# Altium PCB main.PcbDoc (part 1 of 2)
Units mm, origin at the board's own origin, x right, y up, seen from the top; angles counter-clockwise.
Board outline 97 x 82.5 mm, 4 copper layers (Top Layer, Ground Layer, Power Layer, Bottom Layer), stack 1.591 mm thick; 87 components, 68 nets, 365 pads, 232 vias.
Unrouted connection lines stored in the file: 2.
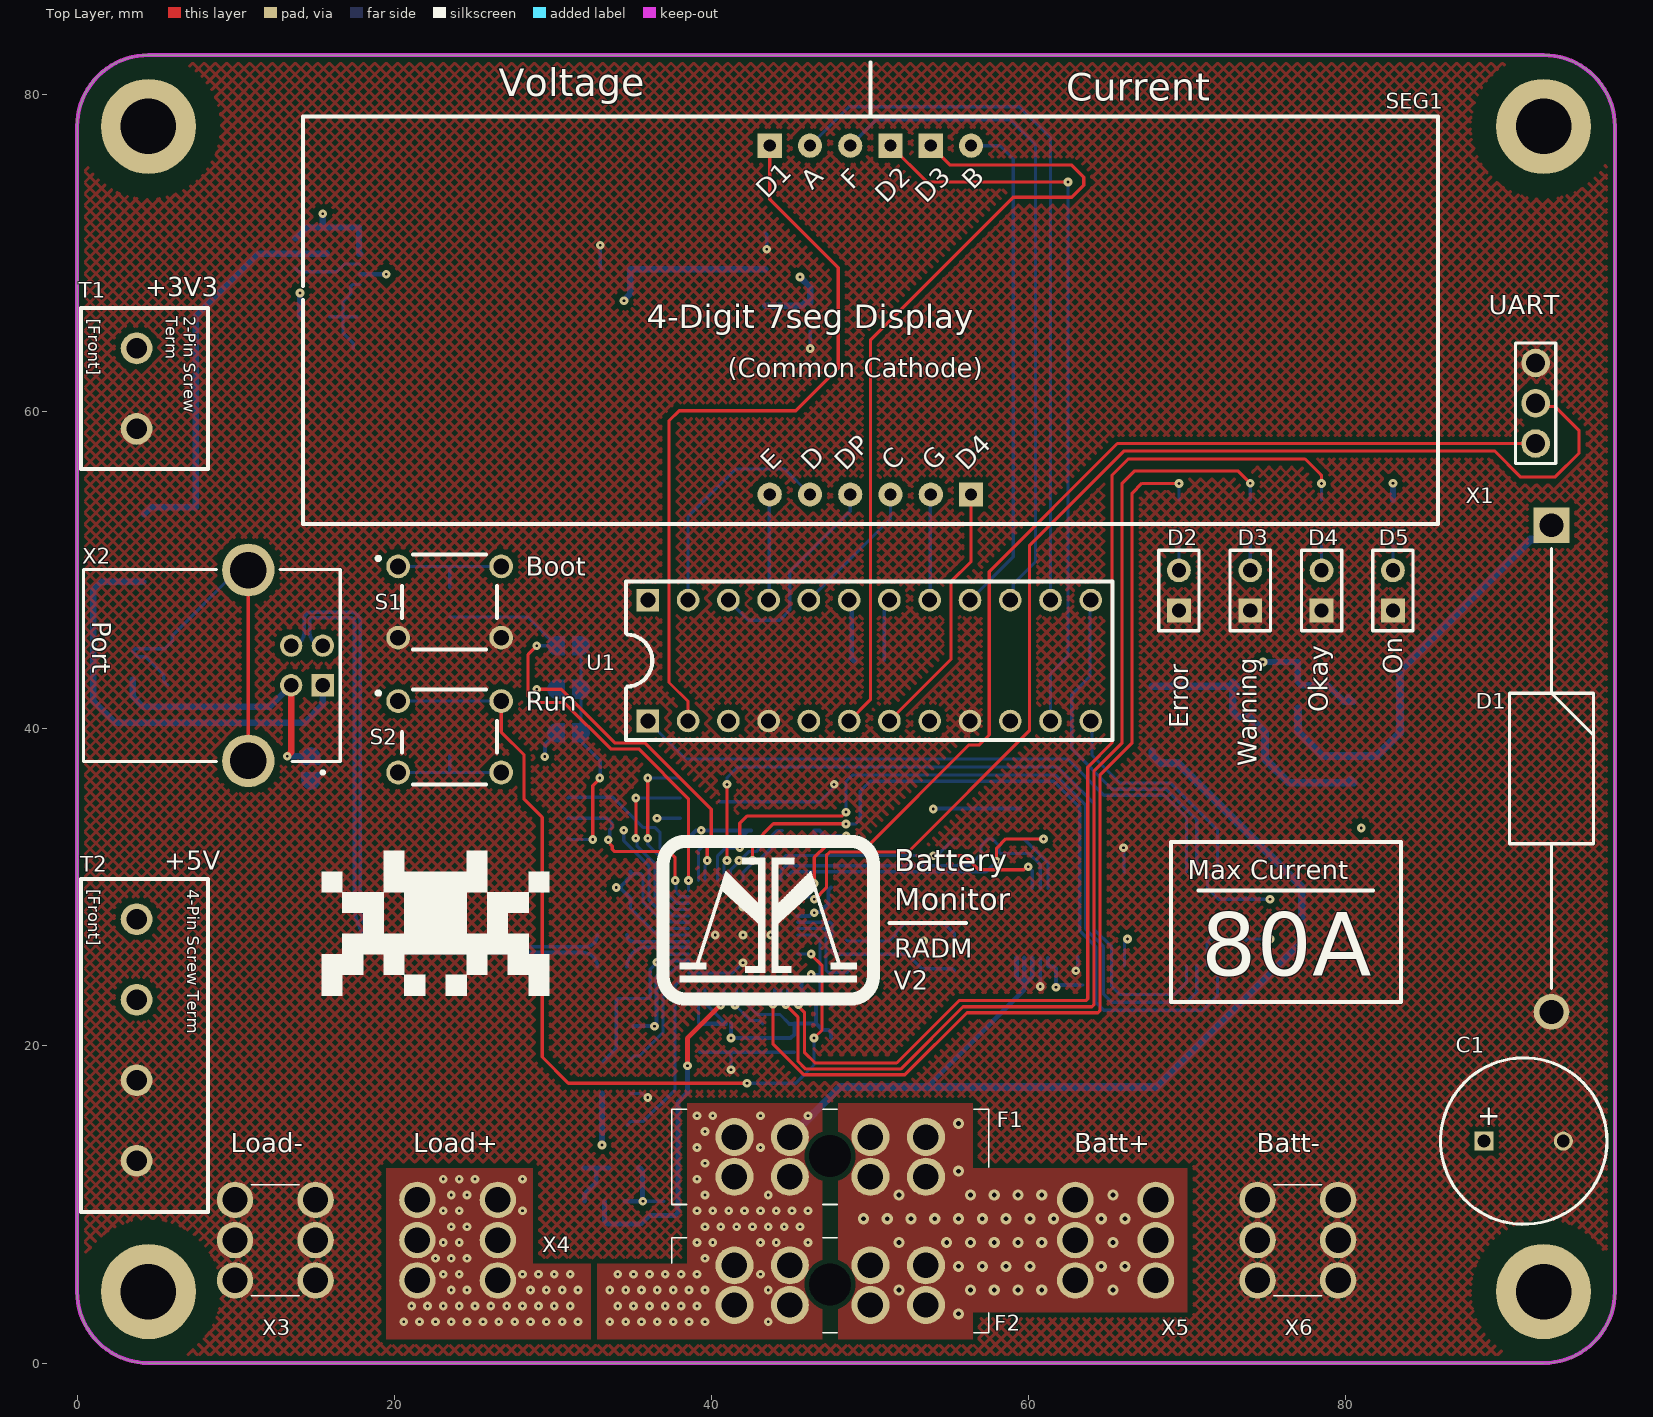
[diagram p0: Top Layer view]
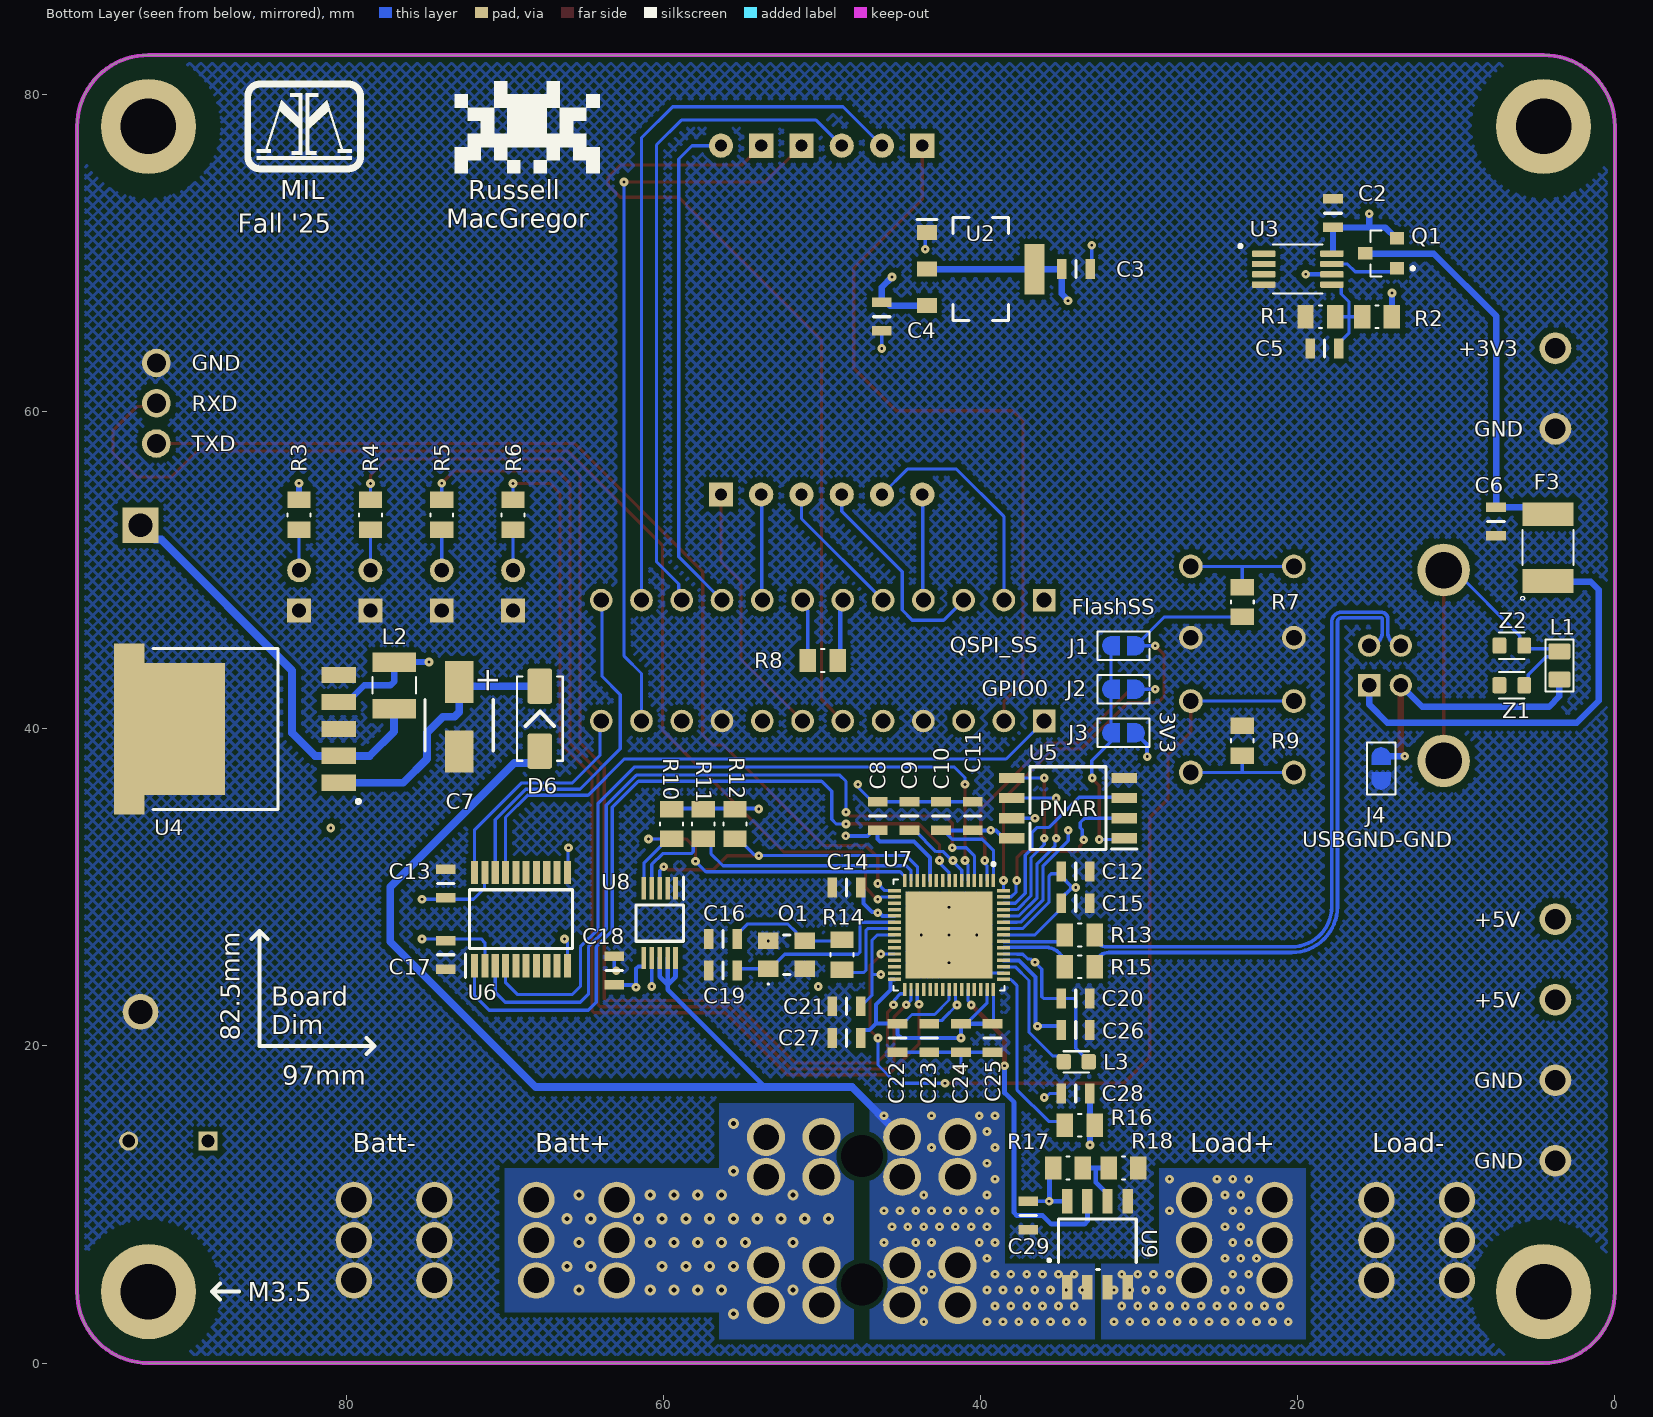
[diagram p1: Bottom Layer view, seen from below]
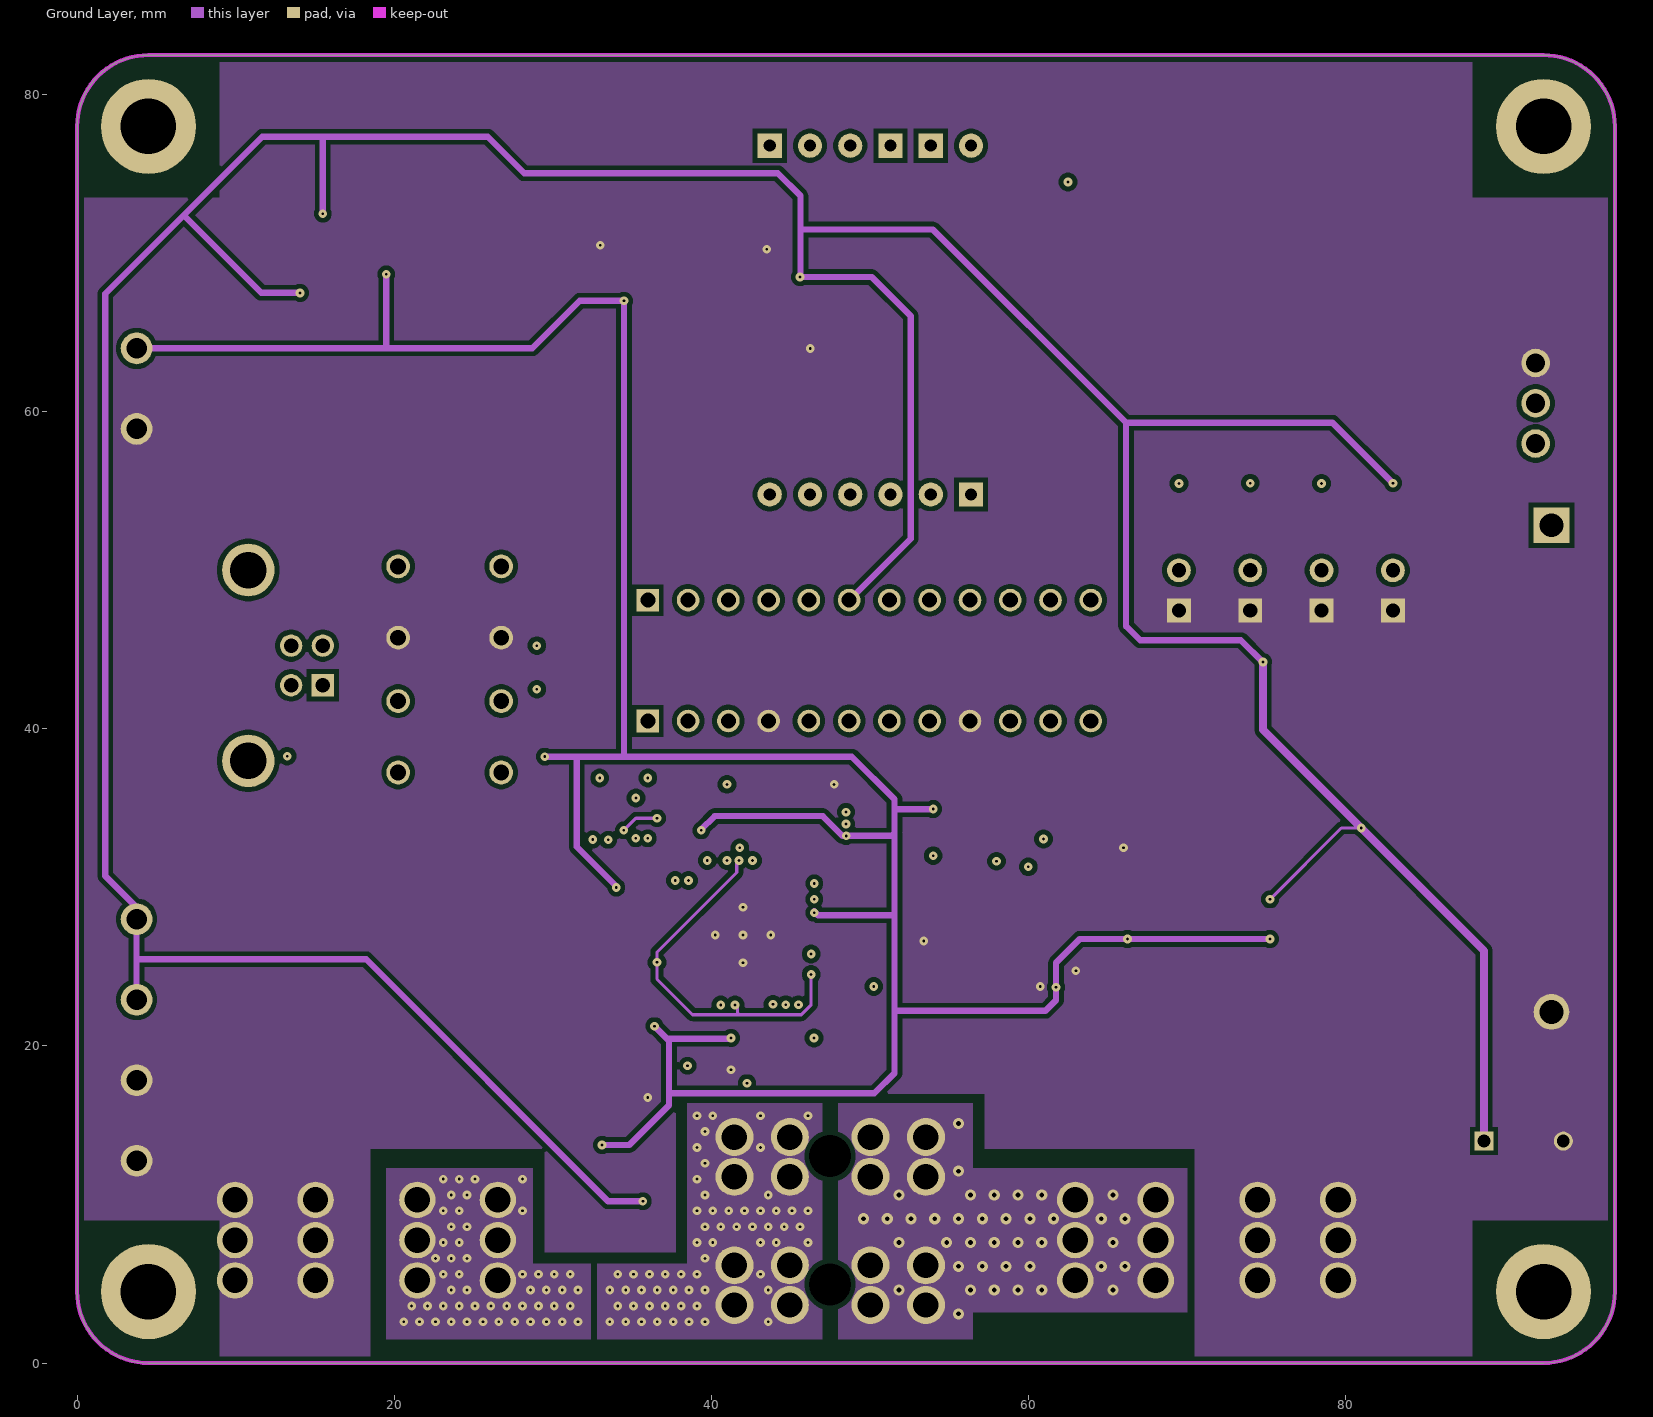
[diagram p2: Ground Layer]
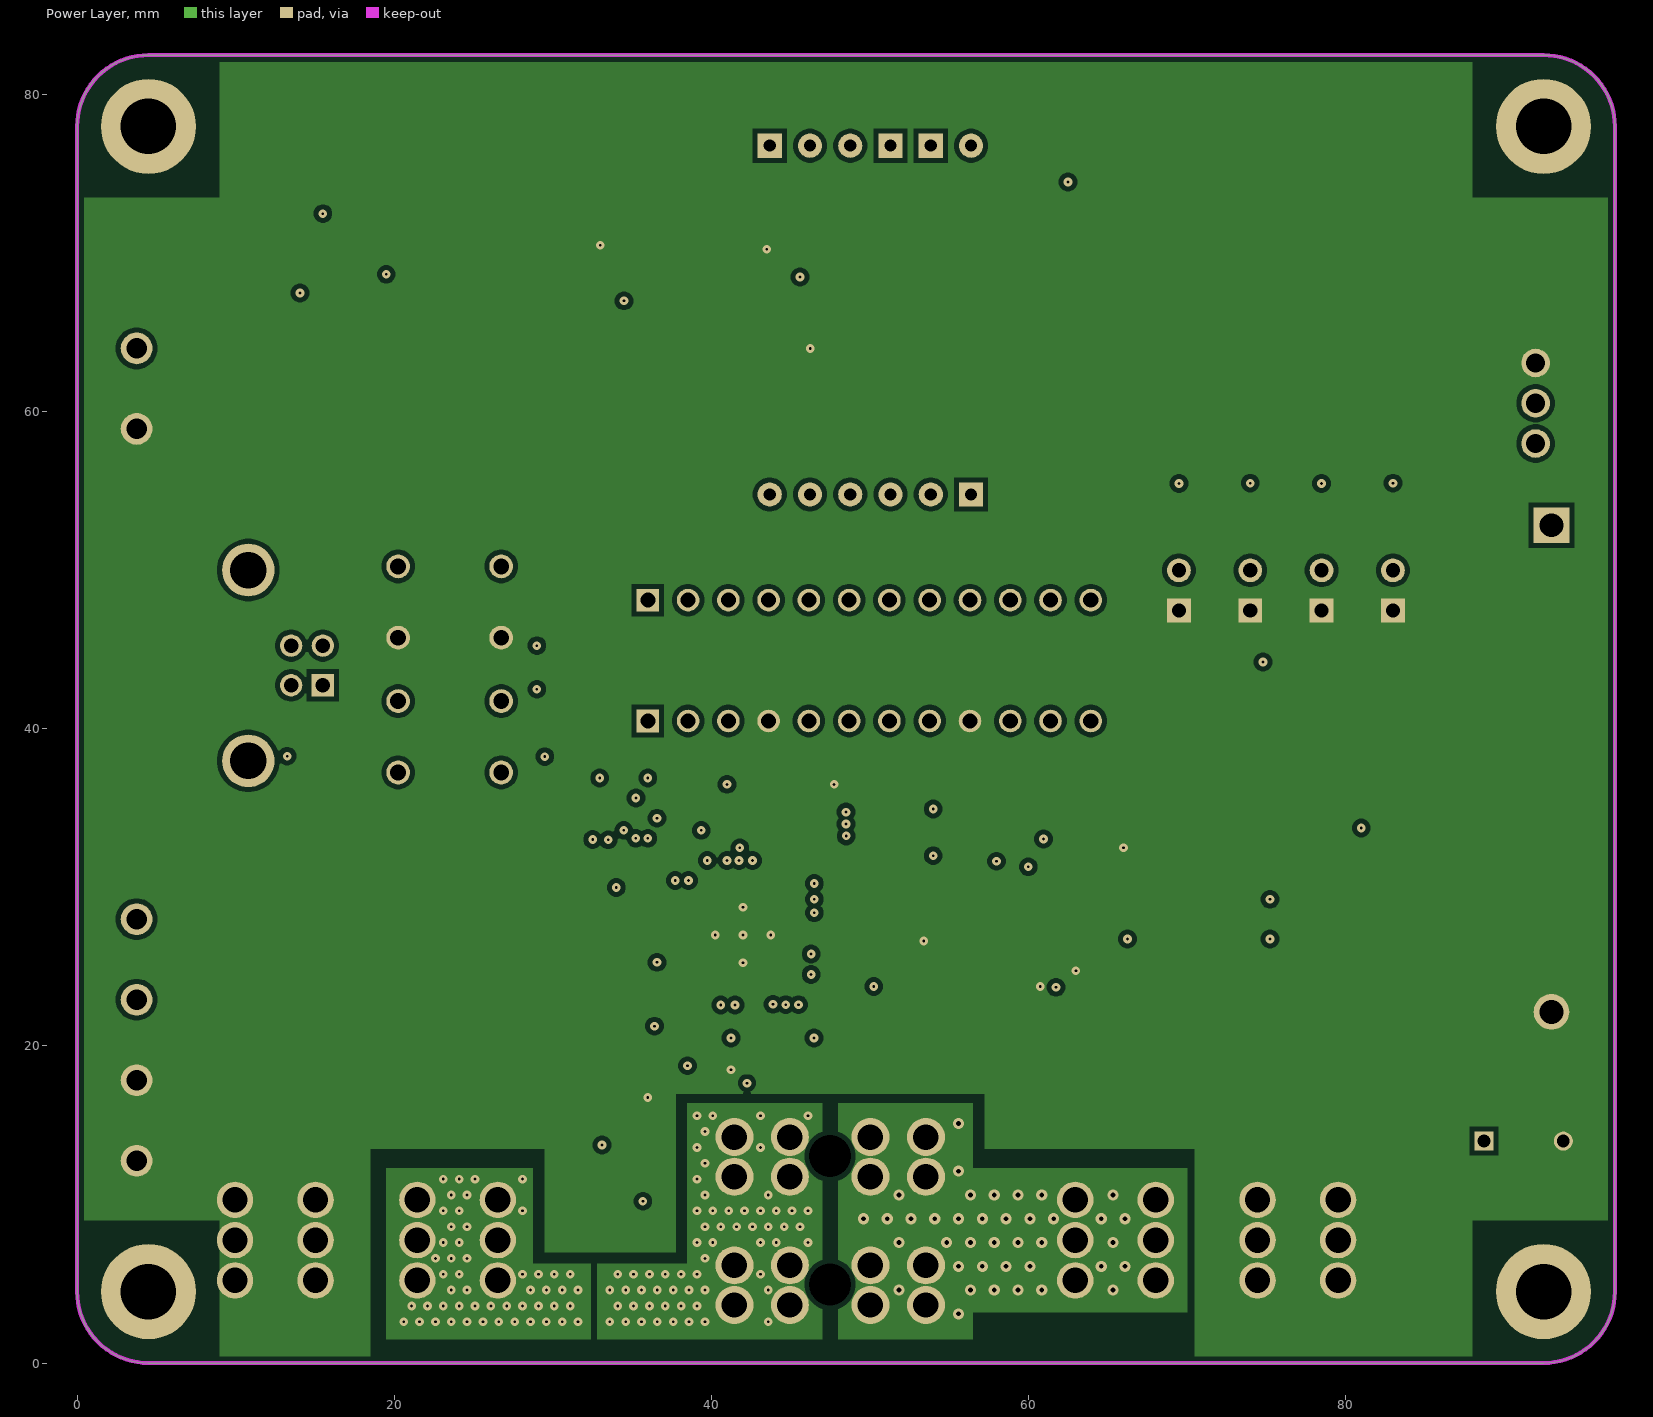
[diagram p3: Power Layer]

## Layer stack, top to bottom
Top Solder: solder mask 0.0102, Solder Resist, Dk 3.8
Top Layer: signal copper 0.035
Dielectric 2: prepreg 0.2104, 7628*1, Dk 4.4
Ground Layer: signal copper 0.0175
Dielectric 1: dielectric 1.065, FR-4, Dk 4.8
Power Layer: signal copper 0.0175
Dielectric 3: prepreg 0.2104, 7628*1, Dk 4.4
Bottom Layer: signal copper 0.035
Bottom Solder: solder mask 0.0102, Solder Resist, Dk 3.8

## Board outline
4.5,0 cw(c4.5,4.5) 0,4.5 0,78 cw(c4.5,78) 4.5,82.5 92.5,82.5 cw(c92.5,78) 97,78 97,4.5 cw(c92.5,4.5) 92.5,0

## Design rules (kind name [scope] priority, off if disabled: settings)
BoardOutlineClearance [All] p1: gap=0.2 ignorepadtopadclearanceinfootprint=FALSE
Clearance "inPolygon Clearance" [InPolygon] p1: gap=0.3 ignorepadtopadclearanceinfootprint=TRUE // this rule ensures that every net within a polygon of a different net has a set clearance from the poly
Clearance "Different Diff Pair" [All] p2: gap=0.2 ignorepadtopadclearanceinfootprint=TRUE
Clearance "Same Diff Pair" [All] p3: gap=0.1 ignorepadtopadclearanceinfootprint=TRUE
Clearance "Different Nets" [not InAnyDifferentialPair] p4: gap=0.3 ignorepadtopadclearanceinfootprint=TRUE except(0.1: Arc-SMDPad Arc-THPad Arc-Via Arc-Text Track-SMDPad Track-THPad Track-Via Track-Text SMDPad-Text THPad-Text Via-Text Fill-Text Poly-Text Region-Text Text-Text; 0.12: Arc-Arc Arc-Track Track-Track; 0.15: SMDPad-SMDPad SMDPad-THPad SMDPad-Via THPad-THPad THPad-Via Via-Via; 0.2: Arc-Hole Track-Hole SMDPad-Hole THPad-Hole Via-Hole Fill-Hole Poly-Hole Region-Hole Text-Hole)
Clearance "Same Net" [not InAnyDifferentialPair] p5: gap=0 ignorepadtopadclearanceinfootprint=TRUE except(0.1: THPad-Via; 0.18: Arc-Arc Arc-Track Track-Track)
ComponentClearance [All] p1: gap=0.102 collisioncheckmode=3 verticalgap=0.102 showdistances=TRUE
DiffPairsRouting "Ethernet Routing" [InDifferentialPairClass('Ethernet_Pairs')] p1: maxlimit=0.25 minlimit=0.2 mostfreqgap=0.25 toplayer_maxgap=0.2 toplayer_prefgap=0.2 toplayer_minwidth=0.25 toplayer_maxwidth=0.25 toplayer_prefwidth=0.25 midlayer1_mingap=0.25 midlayer1_minwidth=0.19 midlayer1_maxwidth=0.19 midlayer1_prefwidth=0.19 midlayer2_mingap=0.25 midlayer2_minwidth=0.19 midlayer2_maxwidth=0.19 midlayer2_prefwidth=0.19 bottomlayer_maxgap=0.2 bottomlayer_prefgap=0.2 bottomlayer_minwidth=0.25 bottomlayer_maxwidth=0.25 bottomlayer_prefwidth=0.25 impedanceprofiledriven=TRUE maxuncoupledlength=12.7
DiffPairsRouting "USB Routing" [InDifferentialPairClass('USB_Pairs')] p2: maxlimit=0.291 minlimit=0.127 mostfreqgap=0.291 toplayer_maxgap=0.127 toplayer_prefgap=0.127 toplayer_minwidth=0.23 toplayer_maxwidth=0.23 toplayer_prefwidth=0.23 midlayer1_mingap=0.291 midlayer1_minwidth=0.25 midlayer1_maxwidth=0.25 midlayer1_prefwidth=0.25 midlayer2_mingap=0.291 midlayer2_minwidth=0.25 midlayer2_maxwidth=0.25 midlayer2_prefwidth=0.25 bottomlayer_maxgap=0.127 bottomlayer_prefgap=0.127 bottomlayer_minwidth=0.23 bottomlayer_maxwidth=0.23 bottomlayer_prefwidth=0.23 impedanceprofiledriven=TRUE impedanceprofileid={B686A9E9-403C-4A07-8FA5-66E601E4FB8D} impedanceprofilevalue=90.000000 maxuncoupledlength=12.7
DiffPairsRouting "CAN Routing" [InDifferentialPairClass('CAN_Pairs')] p3: maxlimit=0.907 minlimit=0.5 mostfreqgap=0.907 toplayer_maxgap=0.5 toplayer_prefgap=0.5 toplayer_minwidth=0.201 toplayer_maxwidth=0.201 toplayer_prefwidth=0.201 midlayer1_mingap=0.907 midlayer1_minwidth=0.155 midlayer1_maxwidth=0.155 midlayer1_prefwidth=0.155 midlayer2_mingap=0.907 midlayer2_minwidth=0.155 midlayer2_maxwidth=0.155 midlayer2_prefwidth=0.155 bottomlayer_maxgap=0.5 bottomlayer_prefgap=0.5 bottomlayer_minwidth=0.201 bottomlayer_maxwidth=0.201 bottomlayer_prefwidth=0.201 impedanceprofiledriven=TRUE maxuncoupledlength=12.7
Height [All] p1: minheight=0 maxheight=1816.048 prefheight=12.7
HoleSize [All] p1: absolutevalues=TRUE maxlimit=6.3 minlimit=0.3 maxpercent=80.000 minpercent=20.000
HoleToHoleClearance [All] p1: gap=0.25 allowstackedmicrovias=FALSE
Length [All] p1: maxlimit=43.432 minlimit=0 usedelayunits=TRUE mindelay=0.000000 maxdelay=10000.000000
MatchedLengths "Diff Pair Matched Delays" [InDifferentialPairClass('Ethernet_Pairs') or InDifferentialPairClass('USB_Pairs') or InDifferentialPairClass('CAN_Pairs')] p1: tolerance=5 checknetsindiffpair=TRUE checkdiffpairvsdiffpair=FALSE checkxsignals=FALSE checkothers=FALSE usedelayunits=TRUE delaytolerance=100.000000
MinimumAnnularRing [All] p1: minimumring=0.2
MinimumSolderMaskSliver [All] p1: minsoldermaskwidth=0
PlaneClearance "Supply Net Clearance" [InNetClass('Supply_Nets')] p1: clearance=0.5
PlaneClearance "All Nets" [All] p2: clearance=0.3
PolygonConnect "Supply Nets" [InNetClass('Supply_Nets')] p1: connectstyle=Direct reliefconductorwidth=0.3 reliefentries=4 polygonreliefangle="90 Angle" airgapwidth=0.254
PolygonConnect General [All] p2: connectstyle=Relief reliefconductorwidth=0.254 reliefentries=4 polygonreliefangle="90 Angle" airgapwidth=0.254
RoutingVias [All] p1: holewidth=0.2 width=0.35 viastyle="Through Hole" minholewidth=0.15 minwidth=0.3 maxholewidth=6.3 maxwidth=6.55
SilkToSilkClearance [All] p1: silktosilkclearance=0
SilkToSolderMaskClearance [All] p1: minsilkscreentomaskgap=0 clearancetoexposedcopper=TRUE
SolderMaskExpansion [All] p1: expansion=0.075 istentingtop=FALSE
SupplyNets "Schematic Supply Nets_33" [InNet('SDA')] p1: voltage=0.000
SupplyNets "Schematic Supply Nets_32" [InNet('SCL')] p2: voltage=0.000
SupplyNets "Schematic Supply Nets_31" [InNet('QSPI_SD2')] p3: voltage=0.000
SupplyNets "Schematic Supply Nets_30" [InNet('D_LOAD (C\S\\)')] p4: voltage=0.000
SupplyNets "Schematic Supply Nets_29" [InNet('MOSI1 5V')] p5: voltage=0.000
SupplyNets "Schematic Supply Nets_28" [InNet('XOUT')] p6: voltage=0.000
SupplyNets "Schematic Supply Nets_27" [InNet('DX_P')] p7: voltage=0.000
SupplyNets "Schematic Supply Nets_26" [InNet('QSPI_SD1')] p8: voltage=0.000
SupplyNets "Schematic Supply Nets_25" [InNet('RUN')] p9: voltage=0.000
SupplyNets "Schematic Supply Nets_24" [InNet('QSPI_SS')] p10: voltage=0.000
SupplyNets "Schematic Supply Nets_23" [InNet('VREG_LX')] p11: voltage=0.000
SupplyNets "Schematic Supply Nets_22" [InNet('VREG_AVDD')] p12: voltage=0.000
SupplyNets "Schematic Supply Nets_21" [InNet('QSPI_SD3')] p13: voltage=0.000
SupplyNets "Schematic Supply Nets_20" [InNet('Load+')] p14: voltage=0.000
SupplyNets "Schematic Supply Nets_19" [InNet('QSPI_SCLK')] p15: voltage=0.000
SupplyNets "Schematic Supply Nets_18" [InNet('Flash SS')] p16: voltage=0.000
SupplyNets "Schematic Supply Nets_17" [InNet('GPIO0')] p17: voltage=0.000
SupplyNets "Schematic Supply Nets_16" [InNet('QSPI_SD0')] p18: voltage=0.000
SupplyNets "Schematic Supply Nets_15" [InNet('+5V')] p19: voltage=0.000
SupplyNets "Schematic Supply Nets_14" [InNet('SCK1')] p20: voltage=0.000
SupplyNets "Schematic Supply Nets_13" [InNet('Battery+')] p21: voltage=0.000
SupplyNets "Schematic Supply Nets_12" [InNet('DX_N')] p22: voltage=0.000
SupplyNets "Schematic Supply Nets_11" [InNet('Current Sense')] p23: voltage=0.000
SupplyNets "Schematic Supply Nets_10" [InNet('Voltage_Alert')] p24: voltage=0.000
SupplyNets "Schematic Supply Nets_9" [InNet('D_LOAD (C\S\\) 5V')] p25: voltage=0.000
SupplyNets "Schematic Supply Nets_6" [InNet('SCK1 5V')] p26: voltage=0.000
SupplyNets "Schematic Supply Nets_4" [InNet('XIN')] p27: voltage=0.000
SupplyNets "Schematic Supply Nets_2" [InNet('MOSI1')] p28: voltage=0.000
SupplyNets "Schematic Supply Nets_8" [InNet('+1V1')] p29: voltage=0.000
SupplyNets "Schematic Supply Nets_7" [InNet('+3V3')] p30: voltage=0.000
SupplyNets "Schematic Supply Nets_3" [InNet('GND')] p31: voltage=0.000
UnRoutedNet [All] p1: checkbadconnections=TRUE
Width [All] p1: maxlimit=100 minlimit=0.1 preferedwidth=0.3
Width "nRF Width" [InNetClass('nRF Signal')] p2: maxlimit=0.379 minlimit=0.263 preferedwidth=0.379 toplayer_minwidth=0.379 midlayer1_maxwidth=0.263 midlayer1_prefwidth=0.263 midlayer2_maxwidth=0.263 midlayer2_prefwidth=0.263 bottomlayer_minwidth=0.379 impedanceprofiledriven=TRUE minimp=50.000000 maximp=50.000000 favimp=50.000000 checkconnectedcopper=TRUE
20 further rules are at their usual default settings.

## Classes and differential pairs
differential pair class USB_Pairs: D DX
net class Supply_Nets: +3V3 +5V Battery+ GND LM2576_OUTPUT LM2576_VIN Load+ NetF1_2
component class "Seven-Seg Displays": C13 C17 R8 SEG1 U1 U6
component class "Primary MCU": C2 C3 C4 C5 C6 C8 C9 C10 C11 C12 C14 C15 C16 C19 C20 C21 C22 C23 C24 C25 C26 C27 C28 D2 D3 D4 D5 F3 J1 J2 J3 J4 L1 L3 O1 Q1 R1 R2 R3 R4 R5 R6 R7 R9 R10 R11 R13 R14 R15 R16 S1 S2 U2 U3 U5 U7 X1 X2 Z1 Z2
component class "DC Step-Down Converter": C1 C7 D1 D6 D9 L2 P4 P5 T1 T2 U4
component class "Battery Monitoring": C18 C29 F1 F2 R12 R17 R18 U8 U9 X3 X4 X5 X6
differential pair DX: +DX_P -DX_N
differential pair D: +D_P -D_N

## Components (designator, comment, footprint, x,y, rotation, side; value= is the part's Value field where it differs from the comment)
C1 "Thru-Hole Polarized" "[Cap] Thru-Hole Polarized 5mm" 91.25,14 r0 top (schematic designator C26)
C2 "[Cap] SMD Nonpolarized" "[Cap] SMD 0805" 17.78,72.528 r270 bottom (schematic designator C23)
C3 "SMD Nonpolarized" "[Cap] SMD 0805" 34,69 r0 bottom (schematic designator C22)
C4 "SMD Nonpolarized" "[Cap] SMD 0805" 46.25,66 r90 bottom (schematic designator C21)
C5 "[Cap] SMD Nonpolarized" "[Cap] SMD 0805" 18.315,64 r180 bottom (schematic designator C24)
C6 "[Cap] SMD Nonpolarized" "[Cap] SMD 0805" 7.493,53.085 r270 bottom (schematic designator C20)
C7 "SMD Polarized" "[Cap] SMD Polarized, 4mm" 72.897,40.767 r270 bottom (schematic designator C25)
C8 "[Cap] SMD Nonpolarized" "[Cap] SMD 0805" 46.5,34.5 r270 bottom (schematic designator C2)
C9 "[Cap] SMD Nonpolarized" "[Cap] SMD 0805" 44.5,34.5 r270 bottom (schematic designator C3)
C10 "[Cap] SMD Nonpolarized" "[Cap] SMD 0805" 42.5,34.5 r270 bottom (schematic designator C4)
C11 "[Cap] SMD Nonpolarized" "[Cap] SMD 0805" 40.5,34.5 r270 bottom (schematic designator C5)
C12 "[Cap] SMD Nonpolarized" "[Cap] SMD 0805" 34.01,31 r0 bottom (schematic designator C6)
C13 "[Cap] SMD Nonpolarized" "[Cap] SMD 0805" 73.75,30.25 r90 bottom (schematic designator C28)
C14 "[Cap] SMD Nonpolarized" "[Cap] SMD 0805" 48.465,30 r180 bottom (schematic designator C1)
C15 "[Cap] SMD Nonpolarized" "[Cap] SMD 0805" 34.01,29 r0 bottom (schematic designator C7)
C16 "[Cap] SMD Nonpolarized" "[Cap] SMD 0805" 56.25,26.75 r180 bottom (schematic designator C18)
C17 "[Cap] SMD Nonpolarized" "[Cap] SMD 0805" 73.75,25.75 r270 bottom (schematic designator C27)
C18 "[Cap] SMD Nonpolarized" "[Cap] SMD 0805" 63.119,24.75 r90 bottom (schematic designator C19)
C19 "[Cap] SMD Nonpolarized" "[Cap] SMD 0805" 56.25,24.75 r180 bottom (schematic designator C17)
C20 "[Cap] SMD Nonpolarized" "[Cap] SMD 0805" 34.01,23 r0 bottom (schematic designator C8)
C21 "[Cap] SMD Nonpolarized" "[Cap] SMD 0805" 48.465,22.5 r180 bottom (schematic designator C16)
C22 "[Cap] SMD Nonpolarized" "[Cap] SMD 0805" 45.25,20.5 r90 bottom (schematic designator C14)
C23 "[Cap] SMD Nonpolarized" "[Cap] SMD 0805" 43.25,20.5 r90 bottom (schematic designator C13)
C24 "[Cap] SMD Nonpolarized" "[Cap] SMD 0805" 41.25,20.5 r90 bottom (schematic designator C12)
C25 "[Cap] SMD Nonpolarized" "[Cap] SMD 0805" 39.25,20.5 r270 bottom (schematic designator C11)
C26 "[Cap] SMD Nonpolarized" "[Cap] SMD 0805" 34.01,21 r0 bottom (schematic designator C9)
C27 "[Cap] SMD Nonpolarized" "[Cap] SMD 0805" 48.465,20.5 r180 bottom (schematic designator C15)
C28 "[Cap] SMD Nonpolarized" "[Cap] SMD 0805" 34.01,17 r180 bottom (schematic designator C10)
C29 "[Cap] SMD Nonpolarized" "[Cap] SMD 0805" 37,9.3 r90 bottom
D1 "1N5822" "[Diode] Thru-Hole Schottky" 93,37.5 r270 top (schematic designator D7)
D2 "LED" "[LED] Thru-Hole, 3mm, Red" 69.5,50 r270 top (schematic designator D4)
D3 "LED" "[LED] Thru-Hole, 3mm, Yellow" 74,50 r270 top
D4 "LED" "[LED] Thru-Hole, 3mm, Green" 78.5,50 r270 top (schematic designator D2)
D5 "LED" "[LED] Thru-Hole, 3mm, White" 83,50 r270 top (schematic designator D1)
D6 "Rectifier" "[Diode] SMD M7" 67.817,40.64 r90 bottom
F1 "Thru-Hole" "[Fuse] Blade (2)" 47.5,13 r0 top (schematic designator F2)
F2 "Thru-Hole" "[Fuse] Blade (2)" 47.5,4.91 r0 top (schematic designator F3)
F3 "PTC" "[PTC] 500mA Trip" 4.223,51.435 r90 bottom (schematic designator F1)
J1 "[Jump] SMD Jumper" "[Jumper] Solderable Jumper" 31,45.25 r0 bottom (schematic designator J3)
J2 "[Jump] SMD Jumper" "[Jumper] Solderable Jumper" 31,42.5 r0 bottom
J3 "[Jump] SMD Jumper" "[Jumper] Solderable Jumper" 31,39.75 r0 bottom (schematic designator J1)
J4 "[Jump] SMD Jumper" "[Jumper] Solderable Jumper" 14.75,37.5 r90 bottom
L1 "MH2029-300Y" "[Ferrite] SMD Bead 0805 (1)" 3.5,44 r270 bottom (schematic designator L3)
L2 "SMD Inductor" "[Inductor] SMD 1210" 77,42.75 r90 bottom (schematic designator L4)
L3 "SMD Inductor" "[Inductor] SMD 0603" 33.975,19 r0 bottom (schematic designator L2)
O1 "12MHz" "[XTAL] SMD 12MHz" 52.25,25.75 r180 bottom
Q1 "PMV48XP" "[FET] P-Channel Mosfet" 14.75,70 r0 bottom
R1 "[Res] SMD Resistor" "[Res] SMD 0805" 18.575,66 r180 bottom (schematic designator R12)
R2 "[Res] SMD Resistor" "[Res] SMD 0805" 15,66 r180 bottom (schematic designator R11)
R3 "[Res] SMD Resistor" "[Res] SMD 0805" 83,53.5 r270 bottom (schematic designator R16)
R4 "[Res] SMD Resistor" "[Res] SMD 0805" 78.5,53.5 r270 bottom (schematic designator R17)
R5 "[Res] SMD Resistor" "[Res] SMD 0805" 74,53.5 r270 bottom (schematic designator R18)
R6 "[Res] SMD Resistor" "[Res] SMD 0805" 69.5,53.5 r270 bottom (schematic designator R19)
R7 "[Res] SMD Resistor" "[Res] SMD 0805" 23.5,48 r270 bottom (schematic designator R14)
R8 "[Res] SMD Resistor" "[Res] SMD 0805" 49.97,44.31 r0 bottom (schematic designator R13)
R9 "[Res] SMD Resistor" "[Res] SMD 0805" 23.5,39.25 r90 bottom (schematic designator R15)
R10 "[Res] SMD Resistor" "[Res] SMD 0805" 59.5,34 r90 bottom (schematic designator R7)
R11 "[Res] SMD Resistor" "[Res] SMD 0805" 57.5,34 r90 bottom (schematic designator R6)
R12 "[Res] SMD Resistor" "[Res] SMD 0805" 55.5,34 r90 bottom (schematic designator R5)
R13 "[Res] SMD Resistor" "[Res] SMD 0805" 33.75,27 r180 bottom (schematic designator R2)
R14 "[Res] SMD Resistor" "[Res] SMD 0805" 48.75,25.75 r90 bottom (schematic designator R1)
R15 "[Res] SMD Resistor" "[Res] SMD 0805" 33.75,25 r180 bottom (schematic designator R3)
R16 "[Res] SMD Resistor" "[Res] SMD 0805" 33.75,15 r180 bottom (schematic designator R4)
R17 "[Res] SMD Resistor" "[Res] SMD 0805" 34.5,12.3 r0 bottom (schematic designator R20)
R18 "[Res] SMD Resistor" "[Res] SMD 0805" 31,12.3 r0 bottom (schematic designator R21)
S1 "Standard pushbutton" "[Switch] Pushbutton" 23.5,48 r0 top
S2 "Standard pushbutton" "[Switch] Pushbutton" 23.5,39.5 r0 top
SEG1 "[7seg] 4-Digit" "[7seg] 4-Digit" 50.038,65.786 r0 top
T1 "[Screw Terminal] 2pin" "[Screw Terminal] 2pin" 3.75,64 r270 top
T2 "4pin Screw Terminal" "[Screw Terminal] 4pin" 3.75,28 r270 top
U1 "MAX7219" "[DIP IC] 24pin, Socket" 36,40.5 r90 top (schematic designator U7)
U2 "3V3 1A" "[Reg] 3V3 Regulator (2)" 40,69 r180 bottom (schematic designator U3)
U3 "LMV358IDGKR" "[IC] Dual Op-Ap" 20,69 r180 bottom (schematic designator U4)
U4 "LM2576" "[IC] Buck Converter" 86.5,40 r180 bottom (schematic designator U9)
U5 "W25Q128JVS" "[IC] 16Mb Flash Memory" 34.5,35 r0 bottom (schematic designator U2)
U6 "[IC] Level Shifter (2)" "[IC] Level Shifter (2)" 69,28 r90 bottom (schematic designator U8)
U7 "[MCU] RP2350A" "[MCU] RP2350A" 42,27 r270 bottom (schematic designator U1)
U8 "INA226" "[IC] Battery Voltage Monitor (36V)" 60.25,27.75 r270 bottom (schematic designator U5)
U9 "TMCS1100A3QDR" "[IC] Hall Effect Current Sensor" 32.639,7.493 r90 bottom (schematic designator U6)
X1 "[JST] Female 3 Pin" "[JST] 3PIN" 92,58 r90 top (schematic designator X2)
X2 "[Port] USB Type-B Female (Thru-Hole)" "[Port] USB Type-B Thru-Hole" 8.5,44 r270 top (schematic designator X1)
X3 "7461057" "[Port] Shank Connector (100A)" 12.5,7.75 r0 top (schematic designator X6)
X4 "7461057" "[Port] Shank Connector (100A)" 24,7.75 r0 top
X5 "7461057" "[Port] Shank Connector (100A)" 65.5,7.75 r0 top (schematic designator X3)
X6 "7461057" "[Port] Shank Connector (100A)" 77,7.75 r0 top (schematic designator X5)
Z1 "[Inductor] SMD Varistor" "[Inductor] SMD Varistor 0603" 6.5,45.25 r0 bottom
Z2 "[Inductor] SMD Varistor" "[Inductor] SMD Varistor 0603" 6.5,42.75 r0 bottom

## Footprints (in the part's own frame and the unit in brackets; to place one, negate y for a bottom-side part, rotate by r counter-clockwise, add the part's x,y. Pads: shape width x height; smd on the part's side, far side on the other; paste and mask are expansions set on the pad)
"[7seg] 4-Digit" [mil]
  round 60 hole 30: 1(-250,-433.07) 2(-150,-433.07) 3(-50,-433.07) 4(50,-433.07) 5(150,-433.07) 7(250,433.07) 10(-50,433.07) 11(-150,433.07)
  rect 60x60 hole 30: 6(250,-433.07) 8(150,433.07) 9(50,433.07) 12(-250,433.07)
  silkscreen extent -1409,-506 1409,506, body extent -1415,-510 1415,510, height 354
"[Cap] SMD 0805" [mm]
  rect 0.6x1.25 smd: 1(-0.9,0) 2(0.9,0)
  silkscreen extent 0,-0.53 0,0.53, body extent -1,-0.63 1,0.63, height 1
"[Cap] SMD Polarized, 4mm" [mm]
  rect 2.65x1.8 smd: 1(-2.2,0) 2(2.2,0)
  silkscreen extent -1.07,-2.15 2.15,2.15, body extent -2.6,-2.25 2.6,2.25, height 5.66
"[Cap] Thru-Hole Polarized 5mm" [mm] "5mm"
  rect 1.2x1.2 hole 0.8: 1(-2.5,0)
  round 1.2 hole 0.8: 2(2.5,0)
  silkscreen extent -5.25,-5.25 5.25,5.25, body extent -5.25,-5.24 5.25,5.24, height 22
"[Diode] SMD M7" [mm]
  rrect15% 2.21x1.53 smd: 1(2.05,0) 2(-2.05,0)
  silkscreen extent -2.65,-1.45 2.65,1.45, body extent -2.53,-1.35 2.52,1.35, height 2.37
"[Diode] Thru-Hole Schottky" [mm] "1N5822"
  rect 2.25x2.25 hole 1.5: 1(-15.35,0)
  round 2.25 hole 1.5: 2(15.35,0)
  silkscreen extent -13.87,-2.65 13.88,2.65, body extent -16,-2.65 16,2.65, height 5.29
"[DIP IC] 24pin, Socket" [mm]
  rect 1.425x1.425 hole 0.95: 1(0,0) 24(7.62,0)
  round 1.425 hole 0.95: 2(0,-2.54) 3(0,-5.08) 4(0,-7.62) 5(0,-10.16) 6(0,-12.7) 7(0,-15.24) 8(0,-17.78) 9(0,-20.32) 10(0,-22.86) 11(0,-25.4) 12(0,-27.94) 13(7.62,-27.94) 14(7.62,-25.4) 15(7.62,-22.86) 16(7.62,-20.32) 17(7.62,-17.78) 18(7.62,-15.24) 19(7.62,-12.7) 20(7.62,-10.16) 21(7.62,-7.62) 22(7.62,-5.08) 23(7.62,-2.54)
  silkscreen extent -1.19,-29.31 8.81,1.37, body extent -1.19,-29.59 8.81,1.65, height 5.02
"[Ferrite] SMD Bead 0805 (1)" [mil]
  rrect25% 40x55 smd: 1(-35,0) 2(35,0)
  silkscreen extent -65,-35 65,35, body extent -39,-24 39,24, height 43
"[FET] P-Channel Mosfet" [mm] "PMV48XP"
  rect 0.9x0.8 smd: 1(-1,0.95) 2(-1,-0.95) 3(1,0)
  silkscreen extent -2.1,-1.45 0.65,1.45, body extent -1.15,-1.45 1.15,1.45, height 1.1
"[Fuse] Blade (2)" [mm]
  round 2.4 hole 1.6: 1(-6.04,-1.25) 1(-6.04,1.25) 1(-2.54,-1.25) 1(-2.54,1.25) 2(2.54,-1.25) 2(2.54,1.25) 2(6.04,-1.25) 2(6.04,1.25)
  round 1.325 hole 2.65 unplated: ""(0,0.045)
  silkscreen extent -10,-3 10,3, body extent -10,-3 10,3, height 18.03
"[IC] 16Mb Flash Memory" [mm] "W25Q128JVSIQ TR"
  rect 1.6x0.65 smd: 1(-3.55,1.905) 2(-3.55,0.635) 3(-3.55,-0.635) 4(-3.55,-1.905) 5(3.55,-1.905) 6(3.55,-0.635) 7(3.55,0.635) 8(3.55,1.905)
  silkscreen extent -4.35,-2.61 2.4,2.62, body extent -3.9,-2.61 3.9,2.62, height 1.95
"[IC] Battery Voltage Monitor (36V)" [mm] "INA226AIDGST"
  rect 1.4x0.3 smd: 1(-2.2,1) 2(-2.2,0.5) 3(-2.2,0) 4(-2.2,-0.5) 5(-2.2,-1) 6(2.2,-1) 7(2.2,-0.5) 8(2.2,0) 9(2.2,0.5) 10(2.2,1)
  silkscreen extent -2.9,-1.5 1.15,1.5, body extent -2.46,-1.5 2.46,1.5, height 1.1
"[IC] Buck Converter" [mm] "LM2576"
  rect 2.16x1.02 smd: 1(6,-3.4) 2(6,-1.7) 3(6,0) 4(6,1.7) 5(6,3.4)
  rect 1.91x1.235 smd: 6(-7.215,-4.782) 6(-7.215,4.782)
  rect 6.99x8.33 smd: 6(-4.675,0)
  silkscreen extent -5.71,-5.08 7.36,5.08, body extent -7.57,-5.08 6.78,5.08, height 4.72
"[IC] Dual Op-Ap" [mm] "LMV358IDGKR"
  rrect25% 1.47x0.4 smd: 1(-2.15,0.975) 2(-2.15,0.325) 3(-2.15,-0.325) 4(-2.15,-0.975) 5(2.15,-0.975) 6(2.15,-0.325) 7(2.15,0.325) 8(2.15,0.975)
  silkscreen extent -3.72,-1.55 1.55,1.55, body extent -2.45,-1.5 2.45,1.5, height 1.1
"[IC] Hall Effect Current Sensor" [mm] "TMCS1100"
  rect 1.528x0.65 smd: 1(-2.711,1.905) 2(-2.711,0.635) 3(-2.711,-0.635) 4(-2.711,-1.905) 5(2.711,-1.905) 6(2.711,-0.635) 7(2.711,0.635) 8(2.711,1.905)
  silkscreen extent -1.6,-2.45 1.6,2.45, body extent -3.01,-2.45 3.01,2.45, height 1.63
"[IC] Level Shifter (2)" [mm]
  rect 1.475x0.45 smd: 1(-2.938,2.925) 2(-2.938,2.275) 3(-2.938,1.625) 4(-2.938,0.975) 5(-2.938,0.325) 6(-2.938,-0.325) 7(-2.938,-0.975) 8(-2.938,-1.625) 9(-2.938,-2.275) 10(-2.938,-2.925) 11(2.938,-2.925) 12(2.938,-2.275) 13(2.938,-1.625) 14(2.938,-0.975) 15(2.938,-0.325) 16(2.938,0.325) 17(2.938,0.975) 18(2.938,1.625) 19(2.938,2.275) 20(2.938,2.925)
  silkscreen extent -3.67,-3.25 1.85,3.5, body extent -3.2,-3.25 3.2,3.25, height 1.13
"[Inductor] SMD 0603" [mm]
  rrect30% 0.9x0.97 smd: 1(-0.785,0) 2(0.785,0)
  silkscreen extent -0.8,-0.66 0.8,0.66, body extent -0.8,-0.4 0.8,0.4, height 0.95
"[Inductor] SMD 1210" [mm]
  rect 1.23x2.76 smd: 1(-1.466,0) 2(1.466,0)
  silkscreen extent -0.53,-1.38 0.53,1.38, body extent -1.6,-1.25 1.6,1.25, height 0.6
"[Inductor] SMD Varistor 0603" [mm] "CG0603MLC-05E"
  rrect25% 0.87x1.02 smd: 1(-0.78,0) 2(0.78,0)
  silkscreen extent -0.8,-0.83 0.8,0.83, body extent -0.8,-0.4 0.8,0.4, height 0.53
"[JST] 3PIN" [mm]
  round 1.8 hole 1.2: 1(0,0) 2(2.54,0) 3(5.08,0)
  silkscreen extent -1.27,-1.27 6.35,1.27, body extent -2.47,-2.33 7.41,3.42, height 7.88
"[Jumper] Solderable Jumper" [mil]
  round 1 smd: 1(-30.71,0) 2(30.71,0)
  Top Layer region: -8.9,-23.62 -8.9,23.62 -28.9,23.62 -28.9,23.62 -39.15,21.28 -47.37,14.73 -51.93,5.26 -51.93,-5.26 -47.37,-14.73 -39.15,-21.28 -28.9,-23.62 -28.9,-23.62
  Top Layer region: 8.9,-23.62 8.9,23.62 28.9,23.62 28.9,23.62 39.15,21.28 47.37,14.73 51.93,5.26 51.93,-5.26 47.37,-14.73 39.15,-21.28 28.9,-23.62 28.9,-23.62
  silkscreen extent -65,-35 65,35
"[LED] Thru-Hole, 3mm, Green" [mm]
  round 1.5 hole 0.9: 1(0,0)
  rect 1.5x1.5 hole 0.9: 2(2.54,0)
  silkscreen extent -1.27,-1.27 3.81,1.27, body extent -0.63,-1.92 2.95,1.92, height 5.6
"[LED] Thru-Hole, 3mm, Red" [mm]
  round 1.5 hole 0.9: 1(0,0)
  rect 1.5x1.5 hole 0.9: 2(2.54,0)
  silkscreen extent -1.27,-1.27 3.81,1.27, body extent -0.63,-1.92 2.95,1.92, height 5.6
"[LED] Thru-Hole, 3mm, White" [mm]
  round 1.5 hole 0.9: 1(0,0)
  rect 1.5x1.5 hole 0.9: 2(2.54,0)
  silkscreen extent -1.27,-1.27 3.81,1.27, body extent -0.63,-1.92 2.95,1.92, height 5.6
"[LED] Thru-Hole, 3mm, Yellow" [mm]
  round 1.5 hole 0.9: 1(0,0)
  rect 1.5x1.5 hole 0.9: 2(2.54,0)
  silkscreen extent -1.27,-1.27 3.81,1.27, body extent -0.63,-1.92 2.95,1.92, height 5.6
"[MCU] RP2350A" [mm]
  rrect25% 0.83x0.22 smd: 1(-3.44,2.8) 2(-3.44,2.4) 3(-3.44,2) 4(-3.44,1.6) 5(-3.44,1.2) 6(-3.44,0.8) 7(-3.44,0.4) 8(-3.44,0) 9(-3.44,-0.4) 10(-3.44,-0.8) 11(-3.44,-1.2) 12(-3.44,-1.6) 13(-3.44,-2) 14(-3.44,-2.4) 15(-3.44,-2.8) 31(3.44,-2.8) 32(3.44,-2.4) 33(3.44,-2) 34(3.44,-1.6) 35(3.44,-1.2) 36(3.44,-0.8) 37(3.44,-0.4) 38(3.44,0) 39(3.44,0.4) 40(3.44,0.8) 41(3.44,1.2) 42(3.44,1.6) 43(3.44,2) 44(3.44,2.4) 45(3.44,2.8)
  rrect25% 0.22x0.83 smd: 16(-2.8,-3.44) 17(-2.4,-3.44) 18(-2,-3.44) 19(-1.6,-3.44) 20(-1.2,-3.44) 21(-0.8,-3.44) 22(-0.4,-3.44) 23(0,-3.44) 24(0.4,-3.44) 25(0.8,-3.44) 26(1.2,-3.44) 27(1.6,-3.44) 28(2,-3.44) 29(2.4,-3.44) 30(2.8,-3.44) 46(2.8,3.44) 47(2.4,3.44) 48(2,3.44) 49(1.6,3.44) 50(1.2,3.44) 51(0.8,3.44) 52(0.4,3.44) 53(0,3.44) 54(-0.4,3.44) 55(-0.8,3.44) 56(-1.2,3.44) 57(-1.6,3.44) 58(-2,3.44) 59(-2.4,3.44) 60(-2.8,3.44)
  rect 5.5x5.5 smd paste-4: 61(0,0)
  silkscreen extent -4.57,-3.5 3.5,3.5, body extent -3.55,-3.55 3.55,3.55, height 0.96
"[Port] Shank Connector (100A)" [mm] "7461057, internal thread"
  round 2.3 hole 1.6: 1(-2.54,-2.54) 1(-2.54,0) 1(-2.54,2.54) 1(2.54,-2.54) 1(2.54,0) 1(2.54,2.54)
  silkscreen extent -1.5,-3.5 1.5,3.5, body extent -3.5,-3.5 3.5,3.5, height 6
"[Port] USB Type-B Thru-Hole" [mm] "USB-B-S-F-B-TH"
  rect 1.408x1.408 hole 0.9: 1(1.25,7)
  round 1.408 hole 0.9: 2(-1.25,7) 3(-1.25,5) 4(1.25,5)
  round 3.316 hole 2.3: S1(-6.02,2.3) S2(6.02,2.3)
  silkscreen extent -6.05,-8.1 6.85,8.1, body extent -7.25,-8.1 7.25,8.4, height 10.7
"[PTC] 500mA Trip" [mm] "Part #: MF-MSMF050-2"
  rect 1.5x3.2 smd: 1(-2.1,0) 2(2.1,0)
  silkscreen extent -3.33,-1.6 1.1,1.73, body extent -2.27,-1.62 2.27,1.62, height 1.1
"[Reg] 3V3 Regulator (2)" [mm]
  rect 1.25x0.95 smd: 1(-3.4,2.3) 2(-3.4,0) 3(-3.4,-2.3)
  rect 1.25x3.2 smd: 2(3.4,0)
  silkscreen extent -4.03,-3.25 1.75,3.25, body extent -3.5,-3.25 3.5,3.25, height 1.8
"[Res] SMD 0805" [mm]
  rect 1.04x1.47 smd: 1(-0.94,0) 2(0.94,0)
  silkscreen extent -0.1,-0.72 0.1,0.72, body extent -1,-0.63 1,0.63, height 0.5
"[Screw Terminal] 2pin" [mm]
  round 2 hole 1.3: 1(0,0) 2(5.08,0)
  silkscreen extent -2.54,-3.5 7.62,4.5, body extent -2.95,-3.5 7.55,4.1, height 9.99
"[Screw Terminal] 4pin" [mm]
  round 2 hole 1.3: 1(0,0) 2(5.08,0) 3(10.16,0) 4(15.24,0)
  silkscreen extent -2.54,-3.5 18.46,4.5, body extent -2.95,-3.5 17.75,4.1, height 9.99
"[Switch] Pushbutton" [mm] "(Regular pushbutton)"
  round 1.5 hole 1: 1(-3.25,2.25) 2(3.25,2.25) 3(-3.25,-2.25) 4(3.25,-2.25)
  silkscreen extent -4.6,-3 3,3, body extent -3.85,-3 3.85,3, height 4.95
"[XTAL] SMD 12MHz" [mm]
  rect 1.3x1.05 smd: 1(-1.15,-0.875) 2(1.15,-0.875) 3(1.15,0.875) 4(-1.15,0.875)
  silkscreen extent -1.2,-1.9 0.2,1.25, body extent -1.6,-1.25 1.6,1.25, height 0.75

## Part data
C1: library part "[Cap] Thru-Hole Polarized", Capacitance=1000uF, Pin Spacing=5mm
C2 C5 C6 C8 C9 C10 C11 C12 C13 C14 C15 C17 C18 C22 C23 C24 C26 C27 C29: Capacitance=100nF, Size Package=0805
C3: library part "[Cap] SMD Nonpolarized", Capacitance=22uF, Size Package=0805, Tolerance=10%, Voltage=35V
C4: library part "[Cap] SMD Nonpolarized", Capacitance=10uF, Size Package=0805, Tolerance=10%, Voltage=35V
C7: library part "[Cap] SMD Polarized", Capacitance=100uF, Diameter=4mm
C16 C19: Capacitance=15pF, Size Package=0805
C20 C21 C25 C28: Capacitance=4.7uF, Size Package=0805
D1: library part "[Diode] Thru-Hole Schottky", Mouser Part #=511-1N5822
D2: library part "[LED] Thru-Hole 3mm", "3mm LED", Color=Red
D3: library part "[LED] Thru-Hole 3mm", "3mm LED", Color=Yellow
D4: library part "[LED] Thru-Hole 3mm", "3mm LED", Color=Green
D5: library part "[LED] Thru-Hole 3mm", "3mm LED", Color=White
D6: library part "[Diode] SMD Rectifier", "Generic", Size Package=M7
F1 F2: library part "[Fuse] Thru-Hole Blade", Capacity=20A
F3: library part "[PTC] 500mA Trip", "MF-MSMF050-2 / JLC Part #: C17313", JLC Part #=C17313, Size Package=1812, Trip Current=500mA
J1 J2 J3 J4: "Solderable jumper"
  J1: NO/NC=NC
  J2 J3 J4: NO/NC=NO
L1: library part "[Ferrite] SMD Ferrite Bead (1)", "652-MH2029-300Y", Res @ Freq="30 @ 100MHz", Size Package=0805
L2: library part "[Inductor] SMD Inductor", Inductance=100uH, Size Package=1210
L3: library part "[Inductor] SMD Inductor", Inductance=10uH, Size Package=0603
O1: library part "[XTAL] SMD 12MHz", "815-ABM8-272-T3"
Q1: library part "[FET] P-Channel MOSFET", JLC Part #=C2959854
R1 R2: Resistance=10k, Size Package=0805
R3 R4 R5 R6: Resistance=220, Size Package=0805
R7 R9 R14: Resistance=1k, Size Package=0805
R8: Resistance=9.53k, Size Package=0805
R10 R11 R12: Resistance=2k, Size Package=0805
R13 R15: Resistance=27, Size Package=0805
R16: Resistance=33, Size Package=0805
R17 R18: Resistance=100k, Size Package=0805
S1 S2: library part "[Switch] Pushbutton"
SEG1: Color=Red, Mouser Part #=474-COM-11405
T2: library part "[Screw Terminal] 4pin"
U1: library part "[DIP IC] 24pin"
U2: library part "[Reg] 3V3 Regulator (2)", "AZ1117CH-3.3TRG1", Supplier Part Number 1=AZ1117CH-3.3TRG1DICT-ND, Supplier 1=DigiKey
U3: library part "[IC] Dual Op-Amp", JLC Part #=C105242
U4: library part "[IC] Buck Converter"
U5: library part "[IC] 16Mb Flash Memory", "W25Q128JVSIQ TR"
U6: "TXS0108EQPWRQ1", Supplier Part Number 1=296-42401-1-ND, Supplier 1=DigiKey
U8: library part "[IC] Battery Voltage Monitor (36V)", "INA226AIDGST"
U9: library part "[IC] Hall Effect Current Sensor", "TMCS1100"
X2: "USB-B-S-F-B-TH", JLC Part #=C5714571
X3 X4 X5 X6: library part "[Port] Shank Connector (100A)", "7461057, internal thread"
Z1 Z2: JLC Part #=C840634, Size Package=0603

## Free pads (board coordinates)
  round 6 hole 3.5: X(4.5,4.5) X(4.5,78) X(92.5,4.5) X(92.5,78)

## Via types
v1: diameter 0.55, hole 0.175, Top Layer to Bottom Layer, 193 vias
v2: diameter 0.7, hole 0.3, Top Layer to Bottom Layer, 39 vias

## Nets (pads, with @x,y where several pads share a name; then routed paths per layer and width w, separated by ;. In a path a pad name is that pad's centre, name@x,y a point inside that pad or via, vN(x,y) a via of type N, cw(c..) or ccw(c..) an arc to the next point about the centre after c; other vN are vias at no path point)
+1V1: C9.2 C20.2 C21.2 C23.2 L3.1 U7.6 U7.23 U7.39 U7.50 | length 48.7
  Ground Layer w0.2: v1@41.577,22.584 41.654,22.508 41.654,22.1 41.783,21.971 ; v1@41.606,31.496 41.606,30.943 36.576,25.913 v1(36.576,25.273) 36.576,24.214 38.819,21.971 41.783,21.971 ; v1(46.3,24.5) 46.3,22.597 45.674,21.971 41.783,21.971
  Bottom Layer w0.2: L3.1@33.19,19 33.19,19.035 34.01,19.855 34.01,22.881 34.129,23 C20.2@34.91,23 36.044,23 36.149,23.105 36.149,24.846 v1(36.576,25.273) 36.671,25.273 36.889,25.491 37.048,25.491 37.346,25.789 37.719,25.789 37.73,25.8 U7.50@38.56,25.8 ; U7.6@41.2,30.44 41.2,31.09 42.368,32.258 42.833,32.258 44.175,33.6 C9.2@44.5,33.6 ; v1(41.5,22.584) 42.365,21.719 42.365,21.695 42.46,21.6 43.05,21.6 C23.2@43.25,21.4 ; v1@41.577,22.584 41.592,22.599 41.592,23.552 U7.39@41.6,23.56 ; U7.23@45.44,27 46.533,27 46.863,26.67 46.863,23.202 C21.2@47.565,22.5 ; v1(46.3,24.5) 46.863,24.5
  other v1: 41.756,31.7